# EAGLE board backplane--blankboard (EAGLE 6.6.0)

Size 100 x 100 mm. Coordinates in mm from the lower left corner, seen from the top.
Outline: 0,0 100,0 100,100 0,100 0,0
Copper layers (1*16): Top 0.035mm / dielectric 1.5mm / Bottom 0.035mm
Design rules "default": minimum track width 10mil, minimum drill 24mil, track to track 8mil, track to pad 8mil, pad to pad 8mil, via to via 8mil, smd to smd 8mil, copper to edge 40mil, drill to drill 8mil, minimum pad ring 10mil, minimum via ring 8mil, stop-mask expansion 4mil, vias tented up to drill 0mil, thermal gap 10mil

## Footprints (pad centres in the part's own frame; a part is rotated, then mirrored left to right if it is on the bottom)
SQUARE = drill 0.7 square: 1 0,0
080X045 = drill 0.7: 1 -2.54,0; 2 2.54,0
050X030_025 = drill 0.7: 1 -1.27,0; 2 1.27,0
063_025 = drill 0.7 square: + -1.27,0 | drill 0.7: - 1.27,0
DIL16 = drill 0.813 long: 1 -8.89,-3.81; 2 -6.35,-3.81; 3 -3.81,-3.81; 4 -1.27,-3.81; 5 1.27,-3.81; 6 3.81,-3.81; 7 6.35,-3.81; 8 8.89,-3.81; 9 8.89,3.81; 10 6.35,3.81; 11 3.81,3.81; 12 1.27,3.81; 13 -1.27,3.81; 14 -3.81,3.81; 15 -6.35,3.81; 16 -8.89,3.81
1X03 = drill 1.016 long: 1 -2.54,0; 2 0,0; 3 2.54,0
PSG_DAUGHTER = drill 1.016 long: BC1 3.81,-1.27; BCDIR 3.81,1.27; CLK 3.81,-3.81; DA0 3.81,-24.13; DA1 3.81,-21.59; DA2 3.81,-19.05; DA3 3.81,-16.51; DA4 3.81,-13.97; DA5 3.81,-11.43; DA6 3.81,-8.89; DA7 3.81,-6.35; FSYNC 3.81,26.67; GND 3.81,24.13; OUT_A 3.81,-29.21; OUT_B 3.81,-26.67; OUT_C 3.81,-31.75; SCLK 3.81,29.21; SDATA 3.81,31.75; VCC 3.81,21.59
1X02 = drill 1.016 long: 1 -1.27,0; 2 1.27,0
R0207/3 = drill 0.7: 1 -3.81,0; 2 3.81,0

## Placement (x,y rotation side)
A  [SQUARE]  -48.26,106.68 0 top  (outside the outline)
B  [SQUARE]  -53.34,106.68 0 top  (outside the outline)
BC1  [SQUARE]  -43.18,106.68 0 top  (outside the outline)
BC_INH  [SQUARE]  -21.59,104.14 0 top  (outside the outline)
BCDIR  [SQUARE]  -48.26,104.14 0 top  (outside the outline)
C1  [080X045]  -36.83,93.98 0 top  (outside the outline)
C2  [080X045]  -45.72,93.98 0 top  (outside the outline)
C3  [080X045]  -54.61,93.98 0 top  (outside the outline)
C4  [080X045]  -63.5,93.98 0 top  (outside the outline)
C5  [050X030_025]  -22.86,92.71 0 top  (outside the outline)
C6  [050X030_025]  -29.21,92.71 0 top  (outside the outline)
C7  [063_025]  -66.04,80.01 0 top  (outside the outline)
CLK_0  [SQUARE]  -57.15,104.14 0 top  (outside the outline)
CLK_1  [SQUARE]  -66.04,104.14 0 top  (outside the outline)
CLK_2  [SQUARE]  -74.93,104.14 0 top  (outside the outline)
CLK_3  [SQUARE]  -83.82,104.14 0 top  (outside the outline)
FSYNC  [SQUARE]  -30.48,104.14 0 top  (outside the outline)
FSYNC_INH  [SQUARE]  -96.52,101.6 0 top  (outside the outline)
FSYNC_MUX  4052N  [DIL16]  -19.05,81.28 0 top  (outside the outline)
IC1  74LS595N  [DIL16]  -36.83,82.55 0 top  (outside the outline)
MIX_0  [SQUARE]  -92.71,104.14 0 top  (outside the outline)
MIX_1  [SQUARE]  -101.6,104.14 0 top  (outside the outline)
MIX_2  [SQUARE]  -20.32,106.68 0 top  (outside the outline)
MIX_3  [SQUARE]  -29.21,106.68 0 top  (outside the outline)
MUX_A  4052N  [DIL16]  -54.61,81.28 0 top  (outside the outline)
OUT_0  [1X03]  -73.66,78.74 0 top  (outside the outline)
OUT_1  [1X03]  -82.55,78.74 0 top  (outside the outline)
OUT_2  [1X03]  -91.44,78.74 0 top  (outside the outline)
OUT_3  [1X03]  -100.33,78.74 0 top  (outside the outline)
PSG_0  PSG_DAUGHTER  [PSG_DAUGHTER]  -29.21,38.1 0 top  (outside the outline)
PSG_1  PSG_DAUGHTER  [PSG_DAUGHTER]  -53.34,38.1 0 top  (outside the outline)
PSG_2  PSG_DAUGHTER  [PSG_DAUGHTER]  -77.47,38.1 0 top  (outside the outline)
PSG_3  PSG_DAUGHTER  [PSG_DAUGHTER]  -101.6,38.1 0 top  (outside the outline)
PWR  [1X02]  -16.51,93.98 0 top  (outside the outline)
R1  [R0207/3]  -73.66,92.71 0 top  (outside the outline)
R2  [R0207/3]  -83.82,92.71 0 top  (outside the outline)
R3  [R0207/3]  -93.98,92.71 0 top  (outside the outline)
R4  [R0207/3]  -104.14,92.71 0 top  (outside the outline)
R5  [R0207/3]  -17.78,99.06 0 top  (outside the outline)
R6  [R0207/3]  -27.94,99.06 0 top  (outside the outline)
R7  [R0207/3]  -38.1,99.06 0 top  (outside the outline)
R8  [R0207/3]  -48.26,99.06 0 top  (outside the outline)
R9  [R0207/3]  -58.42,99.06 0 top  (outside the outline)
R10  [R0207/3]  -68.58,99.06 0 top  (outside the outline)
R11  [R0207/3]  -78.74,99.06 0 top  (outside the outline)
R12  [R0207/3]  -88.9,99.06 0 top  (outside the outline)
R13  [R0207/3]  -99.06,99.06 0 top  (outside the outline)
R14  [R0207/3]  -17.78,101.6 0 top  (outside the outline)
R15  [R0207/3]  -27.94,101.6 0 top  (outside the outline)
R16  [R0207/3]  -38.1,101.6 0 top  (outside the outline)
R17  [R0207/3]  -48.26,101.6 0 top  (outside the outline)
R18  [R0207/3]  -58.42,101.6 0 top  (outside the outline)
R19  [R0207/3]  -68.58,101.6 0 top  (outside the outline)
R20  [R0207/3]  -78.74,101.6 0 top  (outside the outline)
SCLK  [SQUARE]  -36.83,106.68 0 top  (outside the outline)
SDATA  [SQUARE]  -39.37,104.14 0 top  (outside the outline)
SDATA1  [SQUARE]  -106.68,101.6 0 top  (outside the outline)

## Library data of the parts
A B BC1 BC_INH BCDIR CLK_0 CLK_1-CLK_3 FSYNC FSYNC_INH MIX_0 MIX_1-MIX_3 SCLK SDATA SDATA1 = gm-supply
C1-C4 = gm-caps-film-chicklet
C5 C6 = gm-caps-ceramic
C7 = gm-caps-electro-pol
FSYNC_MUX MUX_A = 40xx
IC1 = 74xx-us
OUT_0 OUT_1-OUT_3 PWR = pinhead
PSG_0 PSG_1-PSG_3 = jaapie
R1-R20 = gm-resistors

## Nets
+5V: C5.1 C6.1 C7.+ FSYNC_MUX.16 MUX_A.16 PSG_0.VCC PSG_1.VCC PSG_2.VCC PSG_3.VCC PWR.1
A: A.1 FSYNC_MUX.10 MUX_A.10
B: B.1 FSYNC_MUX.9 MUX_A.9
BC1_0: MUX_A.1 PSG_0.BC1
BC1_1: MUX_A.5 PSG_1.BC1
BC1_2: MUX_A.2 PSG_2.BC1
BC1_3: MUX_A.4 PSG_3.BC1
BC_INH: BC_INH.1 MUX_A.6
BCDIR_0: MUX_A.12 PSG_0.BCDIR
BCDIR_1: MUX_A.14 PSG_1.BCDIR
BCDIR_2: MUX_A.15 PSG_2.BCDIR
BCDIR_3: MUX_A.11 PSG_3.BCDIR
CLK_0: CLK_0.1 PSG_0.CLK
CLK_1: CLK_1.1 PSG_1.CLK
CLK_2: CLK_2.1 PSG_2.CLK
CLK_3: CLK_3.1 PSG_3.CLK
FSYNC: FSYNC.1 FSYNC_MUX.13
FSYNC_0: FSYNC_MUX.12 PSG_0.FSYNC
FSYNC_1: FSYNC_MUX.14 PSG_1.FSYNC
FSYNC_2: FSYNC_MUX.15 PSG_2.FSYNC
FSYNC_3: FSYNC_MUX.11 PSG_3.FSYNC
FSYNC_INH: FSYNC_INH.1 FSYNC_MUX.6
GND: C5.2 C6.2 C7.- FSYNC_MUX.1 FSYNC_MUX.2 FSYNC_MUX.3 FSYNC_MUX.4 FSYNC_MUX.5 FSYNC_MUX.7 FSYNC_MUX.8 IC1.8 MUX_A.7 MUX_A.8 PSG_0.GND PSG_1.GND PSG_2.GND PSG_3.GND PWR.2 R4.2 R5.2 R9.2 R10.2 R14.2 R15.2 R19.2 R20.2
N$1: C1.1 R1.2 R2.2 R3.2 R4.1
N$2: BCDIR.1 MUX_A.13
N$3: BC1.1 MUX_A.3
N$5: C1.2 MIX_0.1 R5.1
N$8: C2.1 R6.2 R7.2 R8.2 R9.1
N$9: C2.2 MIX_1.1 R10.1
N$13: C3.1 R11.2 R12.2 R13.2 R14.1
N$14: C3.2 MIX_2.1 R15.1
N$16: IC1.7 PSG_0.DA7 PSG_1.DA7 PSG_2.DA7 PSG_3.DA7
N$17: IC1.15 PSG_0.DA0 PSG_1.DA0 PSG_2.DA0 PSG_3.DA0
N$18: IC1.1 PSG_0.DA1 PSG_1.DA1 PSG_2.DA1 PSG_3.DA1
N$19: IC1.2 PSG_0.DA2 PSG_1.DA2 PSG_2.DA2 PSG_3.DA2
N$20: IC1.3 PSG_0.DA3 PSG_1.DA3 PSG_2.DA3 PSG_3.DA3
N$21: IC1.4 PSG_0.DA4 PSG_1.DA4 PSG_2.DA4 PSG_3.DA4
N$22: IC1.5 PSG_0.DA5 PSG_1.DA5 PSG_2.DA5 PSG_3.DA5
N$23: IC1.6 PSG_0.DA6 PSG_1.DA6 PSG_2.DA6 PSG_3.DA6
N$24: OUT_0.1 PSG_0.OUT_A R1.1
N$25: OUT_0.2 PSG_0.OUT_B R2.1
N$26: OUT_0.3 PSG_0.OUT_C R3.1
N$27: OUT_1.1 PSG_1.OUT_A R6.1
N$28: OUT_1.2 PSG_1.OUT_B R7.1
N$29: OUT_1.3 PSG_1.OUT_C R8.1
N$30: OUT_2.1 PSG_2.OUT_A R11.1
N$31: OUT_2.2 PSG_2.OUT_B R12.1
N$32: OUT_2.3 PSG_2.OUT_C R13.1
N$33: OUT_3.1 PSG_3.OUT_A R16.1
N$34: OUT_3.2 PSG_3.OUT_B R17.1
N$35: OUT_3.3 PSG_3.OUT_C R18.1
N$38: C4.1 R16.2 R17.2 R18.2 R19.1
N$39: C4.2 MIX_3.1 R20.1
RCK_0: IC1.12 SDATA1.1
SCLK: IC1.11 PSG_0.SCLK PSG_1.SCLK PSG_2.SCLK PSG_3.SCLK SCLK.1
SDATA: IC1.14 PSG_0.SDATA PSG_1.SDATA PSG_2.SDATA PSG_3.SDATA SDATA.1
VCC: IC1.16

## Tracks (layer width: path | path; a pad name or v marks a point on that pad's centre or on a via)
+5V  (9 unrouted)
A  (2 unrouted)
B  (2 unrouted)
BC1_0  (1 unrouted)
BC1_1  (1 unrouted)
BC1_2  (1 unrouted)
BC1_3  (1 unrouted)
BC_INH  (1 unrouted)
BCDIR_0  (1 unrouted)
BCDIR_1  (1 unrouted)
BCDIR_2  (1 unrouted)
BCDIR_3  (1 unrouted)
CLK_0  (1 unrouted)
CLK_1  (1 unrouted)
CLK_2  (1 unrouted)
CLK_3  (1 unrouted)
FSYNC  (1 unrouted)
FSYNC_0  (1 unrouted)
FSYNC_1  (1 unrouted)
FSYNC_2  (1 unrouted)
FSYNC_3  (1 unrouted)
FSYNC_INH  (1 unrouted)
GND  (25 unrouted)
N$1  (4 unrouted)
N$2  (1 unrouted)
N$3  (1 unrouted)
N$5  (2 unrouted)
N$8  (4 unrouted)
N$9  (2 unrouted)
N$13  (4 unrouted)
N$14  (2 unrouted)
N$16  (4 unrouted)
N$17  (4 unrouted)
N$18  (4 unrouted)
N$19  (4 unrouted)
N$20  (4 unrouted)
N$21  (4 unrouted)
N$22  (4 unrouted)
N$23  (4 unrouted)
N$24  (2 unrouted)
N$25  (2 unrouted)
N$26  (2 unrouted)
N$27  (2 unrouted)
N$28  (2 unrouted)
N$29  (2 unrouted)
N$30  (2 unrouted)
N$31  (2 unrouted)
N$32  (2 unrouted)
N$33  (2 unrouted)
N$34  (2 unrouted)
N$35  (2 unrouted)
N$38  (4 unrouted)
N$39  (2 unrouted)
RCK_0  (1 unrouted)
SCLK  (5 unrouted)
SDATA  (5 unrouted)